# Altium PCB SuCOELora.PcbDoc
Units mil, origin at the board's own origin, x right, y up, seen from the top; angles counter-clockwise.
Board outline 4921.26 x 2270.63 mil, 2 copper layers (Top Layer, Bottom Layer); 21 components, 28 nets, 132 pads, 17 vias.
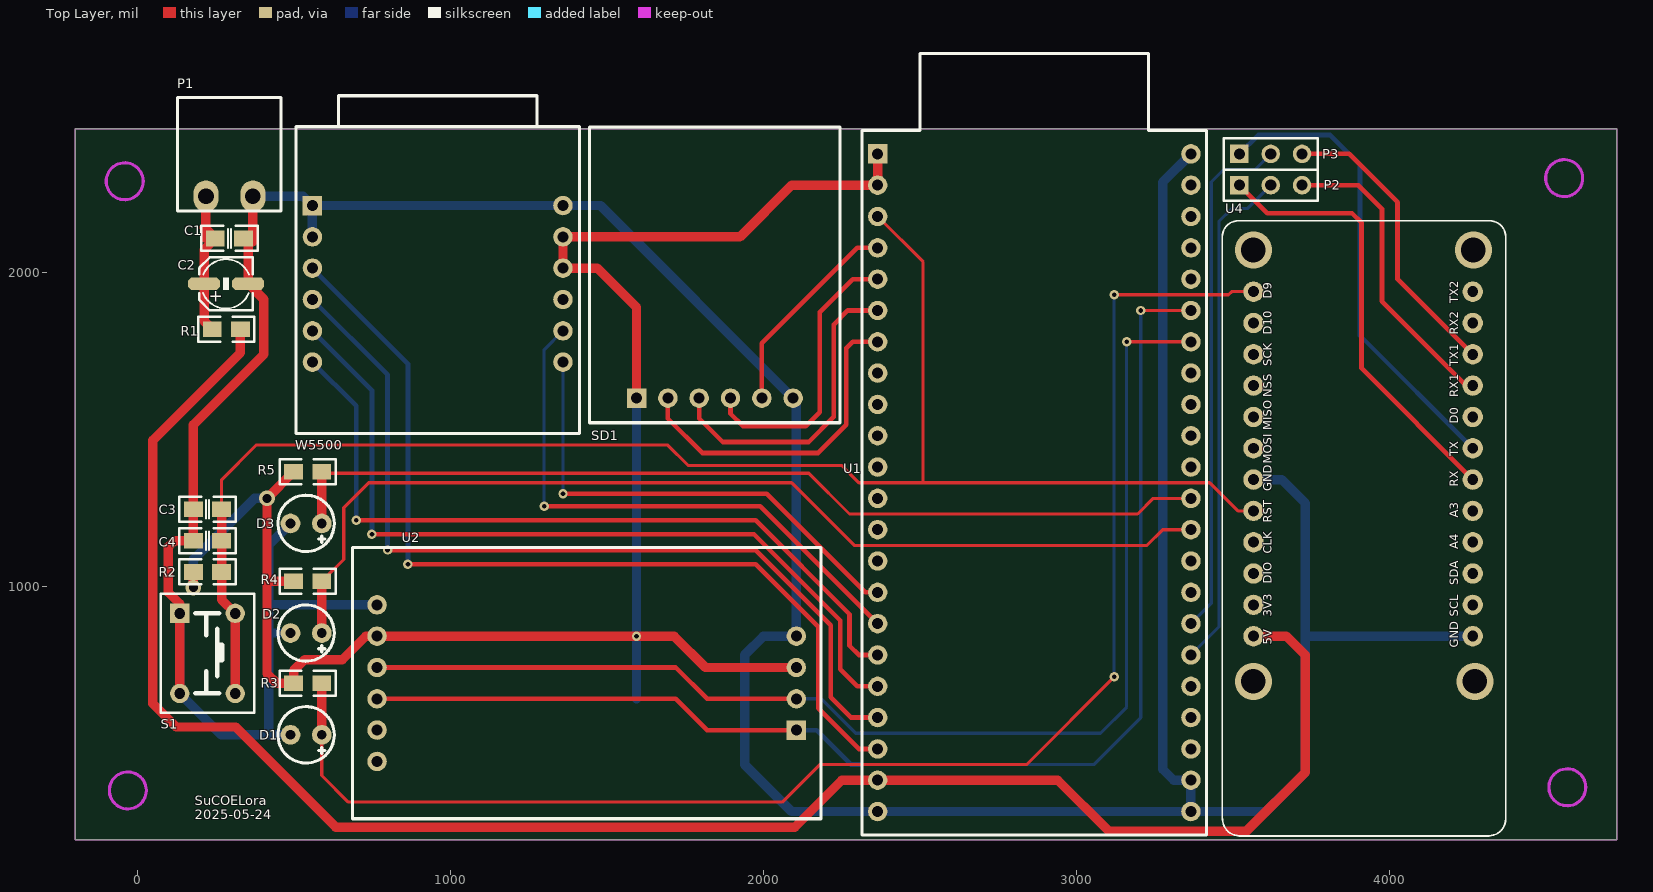
[diagram p0: Top Layer view]
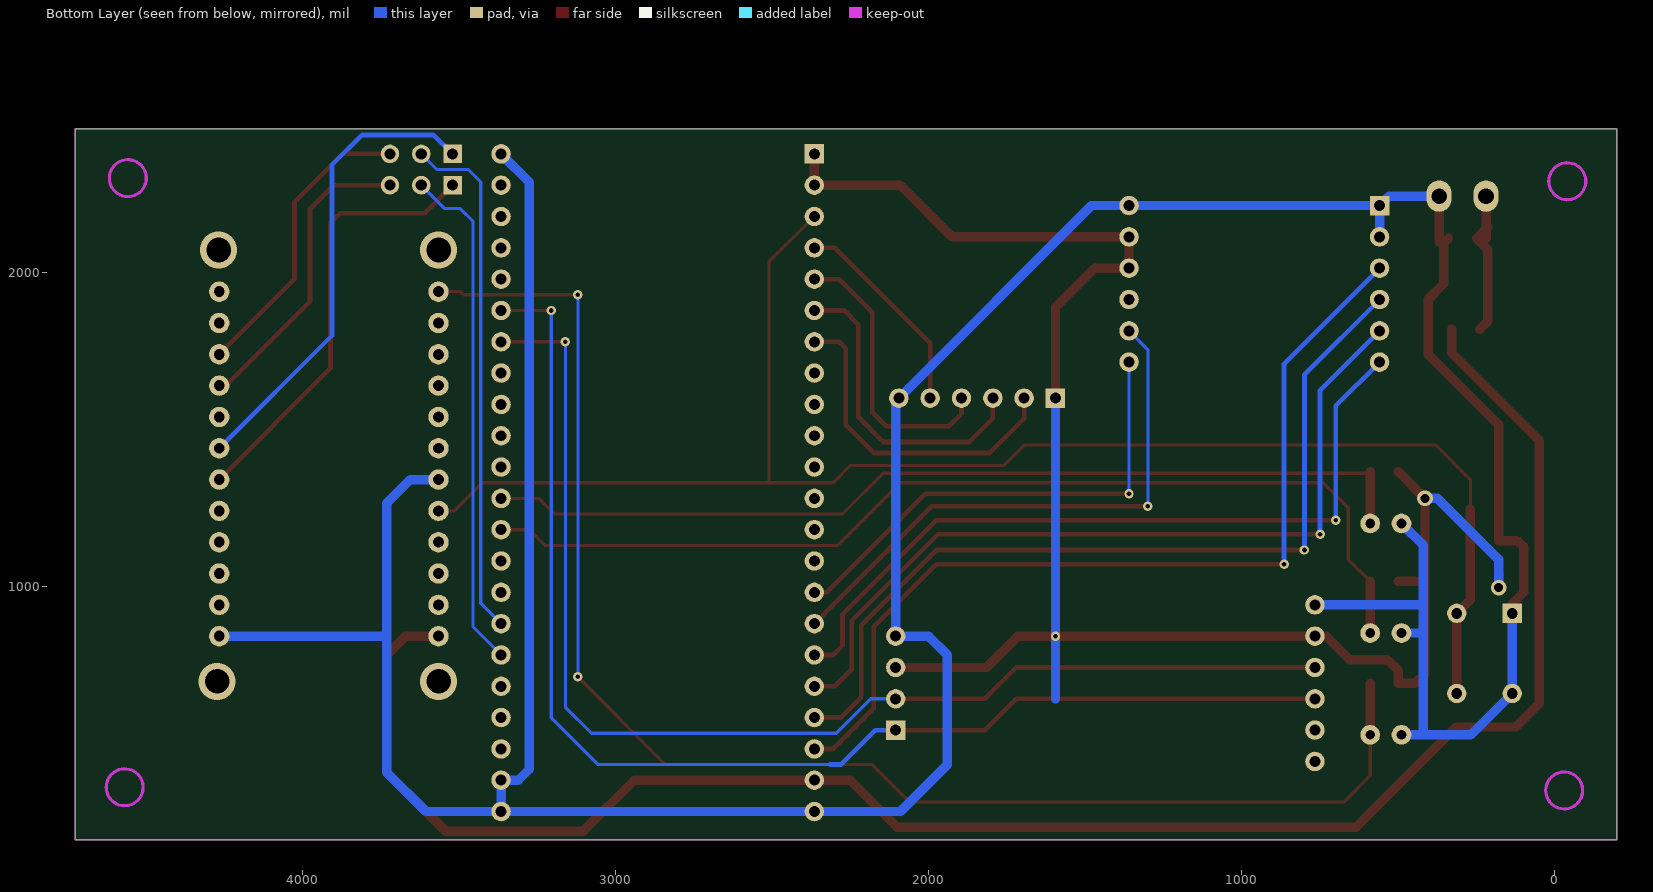
[diagram p1: Bottom Layer view, seen from below]

## Layer stack, top to bottom
Top Solder: solder mask 0.4, Solder Resist, Dk 3.5
Top Layer: signal copper 1.4
Dielectric 1: dielectric 12.6, FR-4, Dk 4.8
Bottom Layer: signal copper 1.4
Bottom Solder: solder mask 0.4, Solder Resist, Dk 3.5

## Board outline
-196.85,190 -196.85,2460.63 4724.41,2460.63 4724.41,190

## Design rules (kind name [scope] priority, off if disabled: settings)
Clearance [All] p1: gap=10
PlaneConnect [All] p1: planeconnectstyle=Direct reliefexpansion=20 reliefentries=4 reliefconductorwidth=10 reliefairgap=10
PolygonConnect [All] p1: connectstyle=Direct reliefconductorwidth=10 reliefentries=4 polygonreliefangle="90 Angle" airgapwidth=10
RoutingVias [All] p1: holewidth=28 width=50 viastyle="Through Hole" minholewidth=28 minwidth=50 maxholewidth=28 maxwidth=50
SolderMaskExpansion [All] p1: expansion=4
Width [All] p1: maxlimit=100 minlimit=10 preferedwidth=15
29 further rules are at their usual default settings.

## Components (designator, comment, footprint, x,y, rotation, side; value= is the part's Value field where it differs from the comment)
C1 "0805-50V-100nF±1%" CC0805 340,2110 r180 top
C2 "SMD-25V-47uF" SMD-EC-F4 214.1,1965 r0 top
C3 "0805-50V-1uF±1%" CC0805 180,1245 r0 top
C4 "0805-50V-100nF±1%" CC0805 180,1145 r0 top
D1 "LED" LED-R3 540,525 r270 top
D2 "LED" LED-R3 540,850 r270 top
D3 "LED" LED-R3 540,1200 r270 top
P1 "Header 2" 2EDJKM3.81-2P 220,2245 r0 top locked
P2 "Header 3" HDR1X3 3520,2280 r0 top
P3 "Header 3" HDR1X3 3520,2380 r0 top
R1 "0R" 0805 240,1820 r0 top
R2 "10k" 0805 270,1045 r180 top
R3 "5k1" 0805 590,690 r180 top
R4 "5k1" 0805 590,1015 r180 top
R5 "5k1" 0805 590,1365 r180 top
S1 "SW-PB" KEY-4P 225,785 r270 top
SD1 "SDCARD" SDCARD 1595,1600 r90 top locked
U1 "ESP32-S3-WROOM-1-N8" ESP32-S3 2365,2380 r0 top locked
U2 "DS3231MODEL" DS3231 2105,540 r180 top locked
U4 "lora e5" USB2.0-TYPE-C 3915.26,392.5 r90 top locked
W5500 "W5500" W5500 560,2215 r0 top locked

## Footprints (in the part's own frame and the unit in brackets; to place one, negate y for a bottom-side part, rotate by r counter-clockwise, add the part's x,y. Pads: shape width x height; smd on the part's side, far side on the other; paste and mask are expansions set on the pad)
2EDJKM3.81-2P [mil]
  oval 80x100 hole 50: 1(0,0) 2(150,0)
  silkscreen extent -91,-47 240,315
0805 [mil]
  rect 60x50 smd: 1(0,0) 2(90,0)
  silkscreen extent -45,-40 135,40
CC0805 [mil]
  rect 60x50 smd: 1(0,0) 2(90,0)
  silkscreen extent -45,-40 135,40
DS3231 [mil]
  rect 62x62 hole 35: 1(0,0)
  round 62 hole 35: 2(0,-100) 3(0,-200) 4(0,-300) 5(1338.58,-400) 6(1338.58,-300) 7(1338.58,-200) 8(1338.58,-100) 9(1338.58,0) 10(1338.58,100)
  silkscreen extent -79,-583 1417,283
ESP32-S3 [mil]
  rect 62x62 hole 35: 1(0,0)
  round 62 hole 35: 2(0,-100) 3(0,-200) 4(0,-300) 5(0,-400) 6(0,-500) 7(0,-600) 8(0,-700) 9(0,-800) 10(0,-900) 11(0,-1000) 12(0,-1100) 13(0,-1200) 14(0,-1300) 15(0,-1400) 16(0,-1500) 17(0,-1600) 18(0,-1700) 19(0,-1800) 20(0,-1900) 21(0,-2000) 22(0,-2100) 23(1000,-2100) 24(1000,-2000) 25(1000,-1900) 26(1000,-1800) 27(1000,-1700) 28(1000,-1600) 29(1000,-1500) 30(1000,-1400) 31(1000,-1300) 32(1000,-1200) 33(1000,-1100) 34(1000,-1000) 35(1000,-900) 36(1000,-800) 37(1000,-700) 38(1000,-600) 39(1000,-500) 40(1000,-400) 41(1000,-300) 42(1000,-200) 43(1000,-100) 44(1000,0)
  silkscreen extent -50,-2175 1050,321
HDR1X3 [mm] "Connector; Header; 3 Position"
  rect 1.5x1.5 hole 0.9: 1(0,0)
  round 1.5 hole 0.9: 2(2.54,0) 3(5.08,0)
  silkscreen extent -1.27,-1.27 6.35,1.27
KEY-4P [mil]
  round 62 hole 35: 1(-127.95,88.58) 1(127.95,88.58) 2(127.95,-88.58)
  rect 62x62 hole 35: 2(-127.95,-88.58)
  silkscreen extent -190,-150 190,150
LED-R3 [mm] "Typical RED GaAs LED; 2 Leads"
  round 1.6 hole 0.8: 1(0,1.27) 2(0,-1.27)
  silkscreen extent -2.29,-2.28 2.29,2.29
SDCARD [mil]
  rect 62x62 hole 35: 1(0,0)
  round 62 hole 35: 2(0,-100) 3(0,-200) 4(0,-300) 5(0,-400) 6(0,-500)
  silkscreen extent -79,-650 866,150
SMD-EC-F4 [mm]
  oct 2.6x1 smd: 1(0,0) 2(3.579,0)
  silkscreen extent -0.38,-2.16 3.94,2.16
USB2.0-TYPE-C [mil] "USB2.0-TYPE-C"
  round 65 hole 35: 1(447.5,350.26) 2(547.5,350.26) 3(647.5,350.26) 4(747.5,350.26) 5(847.5,350.26) 6(947.5,350.26) 7(1047.5,350.26) 8(1147.5,350.26) 9(1247.5,350.26) 10(1347.5,350.26) 11(1447.5,350.26) 12(1547.5,350.26) 13(1547.5,-349.74) 14(1447.5,-349.74) 15(1347.5,-349.74) 16(1247.5,-349.74) 17(1147.5,-349.74) 18(1047.5,-349.74) 19(947.5,-349.74) 20(847.5,-349.74) 21(747.5,-349.74) 22(647.5,-349.74) 23(547.5,-349.74) 24(447.5,-349.74)
  silkscreen extent -190,-455 1774,450
W5500 [mil]
  rect 62x62 hole 35: 1(0,0)
  round 62 hole 35: 2(0,-100) 3(0,-200) 4(0,-300) 5(0,-400) 6(0,-500) 7(800,-500) 8(800,-400) 9(800,-300) 10(800,-200) 11(800,-100) 12(800,0)
  silkscreen extent -53,-728 853,350

## Part data
C1 C3 C4: library part Cap, "Capacitor"
C2: library part "Cap Pol1", "Polarized Capacitor (Radial)"
D1 D2 D3: library part 597-3305-607F, "LED Uni-Color Red 2-Pin Chip 0805 T/R"
P1: "Header, 2-Pin"
P2 P3: "Header, 3-Pin"
R1: library part "0402 SMD Resistor", "SMD Chip Resistor, Jumper, 0 ohm, 100 mW, 0402 [1005 Metric], Thick Film, General Purpose"
R2: library part "0402 SMD Resistor", "Res Thick Film 0402 10K Ohm 5% 0.125W(1/8W) ±200ppm/C Pad SMD T/R"
R3 R4 R5: library part "0402 SMD Resistor", "General Purpose Chip Resistor Thick Film 0402 5.1kOhm 1% Paper T/R"
S1: "Switch"
U1: "<a href=\"https://pricing.snapeda.com/parts/ESP32S3WROOM1N8R8/Espressif%20Systems/view-part?ref=eda\">Check availability</a>  <a href=\"https://pricing.snapeda.com/parts/ESP32-S3-WROOM-1-N8R8/Espressif%20Systems/view-part?ref=eda\">Check availability</a>"

## Via types
v1: diameter 30, hole 15, Top Layer to Bottom Layer, 11 vias
v2: diameter 118.11/118.11 (per signal layer), hole 78.74, Top Layer to Bottom Layer, 4 vias
v3: diameter 50, hole 28, Top Layer to Bottom Layer, 2 vias

## Nets (pads, with @x,y where several pads share a name; then routed paths per layer and width w, separated by ;. In a path a pad name is that pad's centre, name@x,y a point inside that pad or via, vN(x,y) a via of type N, cw(c..) or ccw(c..) an arc to the next point about the centre after c; other vN are vias at no path point)
32K: U2.10
+3V3: R2.2 R3.2 R4.2 R5.2 SD1.1 U1.1 U1.2 U2.3 U2.6 W5500.10 W5500.11 | length 5860.5
  Top Layer w30: v3(180,995) R2.2 ; R4.2 415,1015 ; R5.2 v3(415,1280) 415,1015 ; SD1.1 1595,1890 1470,2015 W5500.10 W5500.11 1925,2115 2090,2280 U1.2 U1.1 ; U2.3 1815,740 1715,840 v1(1595,840) U2.6 730,840 655,765 535,765 500,730 R3.2 445,690 415,720 415,1015
  Bottom Layer w30: v3(180,995) 180,1085 375,1280 v3(415,1280) ; 1595,640 v1(1595,840) SD1.1
+5V: R1.2 U1.21 U4.1 | length 5926.6
  Top Layer w30: R1.2 330,1745 50,1465 50,625 125,550 315,550 635,230 2100,230 2250,380 U1.21 2940,380 3102.5,217.5 3542.5,217.5 3730,405 3730,780 3670,840 U4.1
DS3231_SCL: U1.39 U2.1 U2.8 | length 4047.7
  Top Layer w10: v1(3205,1880) U1.39
  Top Layer w15: U2.8 1720,640 1820,540 U2.1
  Bottom Layer w10: 2315,430 3055,430 3205,580 v1(3205,1880)
  Bottom Layer w15: U2.1 2170,540 2280,430 2315,430
DS3231_SDA: U1.38 U2.2 U2.7 | length 3886.7
  Top Layer w10: v1(3160,1780) U1.38
  Top Layer w15: U2.7 1720,740 1820,640 U2.2
  Bottom Layer w10: U2.2 2185,640 2295,530 3076.57,530 3160,613.43 v1(3160,1780)
ESP32_LED1: D2.1 R4.1 U1.32 | length 3270.7
  Top Layer w10: R4.1 660,1085 660,1250 740,1330 2090,1330 2290,1130 3225,1130 3275,1180 U1.32
  Top Layer w30: D2.1 R4.1
ESP32_LED2: D3.1 R5.1 U1.33 | length 3026.6
  Top Layer w10: R5.1 585,1360 590,1360 2145,1360 2275,1230 3195,1230 3245,1280 U1.33
  Top Layer w30: D3.1 590,1360 R5.1
GND: C1.1 C2.2 C3.1 C4.1 D1.2 D2.2 D3.2 P1.2 S1.2 SD1.6 U1.22 U1.23 U1.24 U1.44 U2.4 U2.5 U4.6 U4.24 W5500.1 W5500.2 W5500.12 | length 12656
  Top Layer w30: S1.2@136.42,657.05 136.42,912.95 136.42,943.58 100,980 100,1125 120,1145 C4.1 C3.1 180,1515 405,1740 405,1915 C2.2 355,2095 C1.1 ; 370,2100 P1.2@370,2215
  Bottom Layer w30: S1.2@136.42,912.95 136.42,657.05 268.46,525 420,525 ; P1.2 530,2245 W5500.1 ; D1.2 420,525 ; D2.2 425,850 420,845 ; D3.2 420,1130 420,940 ; W5500.2 W5500.1 ; U2.5 420,940 ; U1.44 3275,2290 3275,415 3310,380 U1.24 U1.23 ; U4.6 3655,1340 3730,1265 3730,840 ; U4.24 3730,840 ; 420,525 420,845 ; 420,845 420,940 ; W5500.1 W5500.12 1480,2215 SD1.6 2105,1590 U2.4 2000,840 1940,780 1940,430 2090,280 U1.22 U1.23 ; U1.23 3605,280 3730,405 3730,840
LORA_RX: P2.2 U1.28 | length 1634.9
  Bottom Layer w10: U1.28 3455,870 3455,2165 3495,2205 3545,2205 P2.2
LORA_TX: P3.2 U1.29 | length 1664.2
  Bottom Layer w10: U1.29 3430,945 3430,2290 3470,2330 3570,2330 P3.2
LORAWAN_LED: D1.1 R3.1 U4.12 | length 4695
  Top Layer w10: D1.1 590,395 675,310 2060,310 2180,430 2840,430 v1(3120,710) ; v1(3120,1930) 3485,1930 3495,1940 U4.12
  Top Layer w30: D1.1 R3.1
  Bottom Layer w10: v1(3120,710) v1(3120,1930)
NetC1_2: C1.2 C2.1 P1.1 R1.1 | length 470.1
  Top Layer w30: 215,2145 220,2140 ; C1.2@220,2110 220,2140 ; P1.1@220,2215 220,2140 ; R1.1 214.1,1845.9 C2.1 214.1,2074.1 C1.2 220,2140
NetP2_1: P2.1 U4.19 | length 1406.8
  Top Layer w15: P2.1 3609.5,2190.5 3879.5,2190.5 3910,2160 3910,1695 U4.19
NetP2_3: P2.3 U4.16 | length 982.9
  Top Layer w15: P2.3 3900,2280 3975,2205 3975,1910 4245,1640 U4.16
NetP3_1: P3.1 U4.18 | length 1503.3
  Bottom Layer w15: P3.1 3580,2440 3810,2440 3905,2345 3905,1800 U4.18
NetP3_3: P3.3 U4.15 | length 953.6
  Top Layer w15: P3.3 3870,2380 4025,2225 4025,1980 U4.15
NRST: C3.2 C4.2 R2.1 S1.1 U1.3 U4.5 | length 5038.6
  Top Layer w10: C3.2 270,1340 380,1450 1695,1450 1760,1385 2250,1385 2305,1330 2510,1330 ; U1.3 2510,2035 2510,1330 ; U4.5 3515,1240 3425,1330 2510,1330
  Top Layer w30: C3.2 C4.2 R2.1 270,956.54 313.58,912.95 S1.1@313.58,657.05
SD_CLK: SD1.4 U1.5 | length 918.7
  Top Layer w15: SD1.4 1895,1550 1935,1510 2135,1510 2180,1555 2180,1875 2285,1980 U1.5
SD_MISO: SD1.5 U1.4 | length 671.3
  Top Layer w15: SD1.5 1995,1775 2300,2080 U1.4
SD_MOSI: SD1.3 U1.6 | length 1012.8
  Top Layer w15: SD1.3 1795,1535 1870,1460 2145,1460 2225,1540 2225,1835 2270,1880 U1.6
SD_NCS: SD1.2 U1.7 | length 1071.1
  Top Layer w15: SD1.2 1695,1535 1805,1425 2175,1425 2265,1515 2265,1760 2285,1780 U1.7
SQW: U2.9
W5500_MISO: U1.15 W5500.7 | length 1559.6
  Top Layer w15: v1(1360,1295) 2010,1295 2325,980 U1.15
  Bottom Layer w10: v1(1360,1295) 1360,1705 1355,1710 W5500.7
W5500_MOSI: U1.20 W5500.3 | length 2968
  Top Layer w15: v1(865,1070) 1975,1070 2175,870 2175,610 2305,480 U1.20
  Bottom Layer w15: W5500.3 865,1710 v1(865,1070)
W5500_NCS: U1.18 W5500.5 | length 2635.4
  Top Layer w15: v1(750,1165) 1970,1165 2245,890 2245,735 2300,680 U1.18
  Bottom Layer w15: W5500.5 750,1625 v1(750,1165)
W5500_NINTN: U1.17 W5500.6 | length 2464.7
  Top Layer w15: v1(700,1210) 1975,1210 2275,910 2275,810 2305,780 U1.17
  Bottom Layer w15: W5500.6 700,1575 v1(700,1210)
W5500_NRST: U1.16 W5500.8 | length 1805.2
  Top Layer w15: v1(1300,1255) 1990,1255 U1.16
  Bottom Layer w10: v1(1300,1255) 1300,1755 W5500.8
W5500_SCK: U1.19 W5500.4 | length 2820.7
  Top Layer w15: v1(800,1115) 1975,1115 2215,875 2215,645 2280,580 U1.19
  Bottom Layer w15: W5500.4 800,1675 v1(800,1115)
pads on no net: U1.8 U1.9 U1.10 U1.11 U1.12 U1.13 U1.14 U1.25 U1.26 U1.27 U1.30 U1.31 U1.34 U1.35 U1.36 U1.37 U1.40 U1.41 U1.42 U1.43 U4.2 U4.3 U4.4 U4.7 U4.8 U4.9 U4.10 U4.11 U4.13 U4.14 U4.17 U4.20 U4.21 U4.22 U4.23 W5500.9
copper on no net:
  other v2: 3564.43,695.57 4271.93,695.57 3564.43,2073.07 4266.93,2073.07

## Keep-outs
Keep-Out Layer:
  circle w10: c4556.93,2302.52 r59.06
  circle w10: c4566.93,357.48 r59.06
  circle w10: c-29.37,347.48 r59.06
  circle w10: c-39.37,2292.52 r59.06
  lines w5: -196.85,190 -196.85,2460.63 4724.41,2460.63 4724.41,190 -196.85,190

## Silkscreen, mask and mechanical layers (free items; w line width, h text height)
Top Overlay:
  text "SuCOELora" at 185,300 h30
  text "2025-05-24" at 185,255 h30

## Text inside footprints (layer, text, board x,y; h text height)
C2: Top Overlay "+" at 228.68,1907.52 h39.37
U4: Top Overlay "5V" at 3632.62,812.5 h46.5 r90; Top Overlay "3V3" at 3632.62,902.5 h46.5 r90; Top Overlay "DIO" at 3632.62,1007.5 h46.5 r90; Top Overlay "CLK" at 3632.62,1102.5 h46.5 r90; Top Overlay "RST" at 3632.62,1202.5 h46.5 r90; Top Overlay "GND" at 3632.62,1302.5 h46.5 r90; Top Overlay "MOSI" at 3632.62,1390 h46.5 r90; Top Overlay "MISO" at 3632.62,1497.5 h46.5 r90; Top Overlay "NSS" at 3632.62,1602.5 h46.5 r90; Top Overlay "SCK" at 3632.62,1702.5 h46.5 r90; Top Overlay "D10" at 3632.62,1802.5 h46.5 r90; Top Overlay "D9" at 3632.62,1917.5 h46.5 r90; Top Overlay "TX2" at 4227.9,1902.5 h46.5 r90; Top Overlay "RX2" at 4227.9,1802.5 h46.5 r90; Top Overlay "TX1" at 4227.9,1702.5 h46.5 r90; Top Overlay "RX1" at 4227.9,1602.5 h46.5 r90; Top Overlay "D0" at 4227.9,1517.5 h46.5 r90; Top Overlay "GND" at 4227.9,802.5 h46.5 r90; Top Overlay "SCL" at 4227.9,902.5 h46.5 r90; Top Overlay "SDA" at 4227.9,1002.5 h46.5 r90; Top Overlay "A4" at 4227.9,1117.5 h46.5 r90; Top Overlay "A3" at 4227.9,1217.5 h46.5 r90; Top Overlay "TX" at 4227.9,1415 h46.5 r90; Top Overlay "RX" at 4227.9,1317.5 h46.5 r90